# Altium PCB analog circuit pcb.PcbDoc
Units mil, origin at the board's own origin, x right, y up, seen from the top; angles counter-clockwise.
Board outline 4920 x 7755 mil, 2 copper layers (Top Layer, Bottom Layer); 48 components, 33 nets, 163 pads, 4 vias.
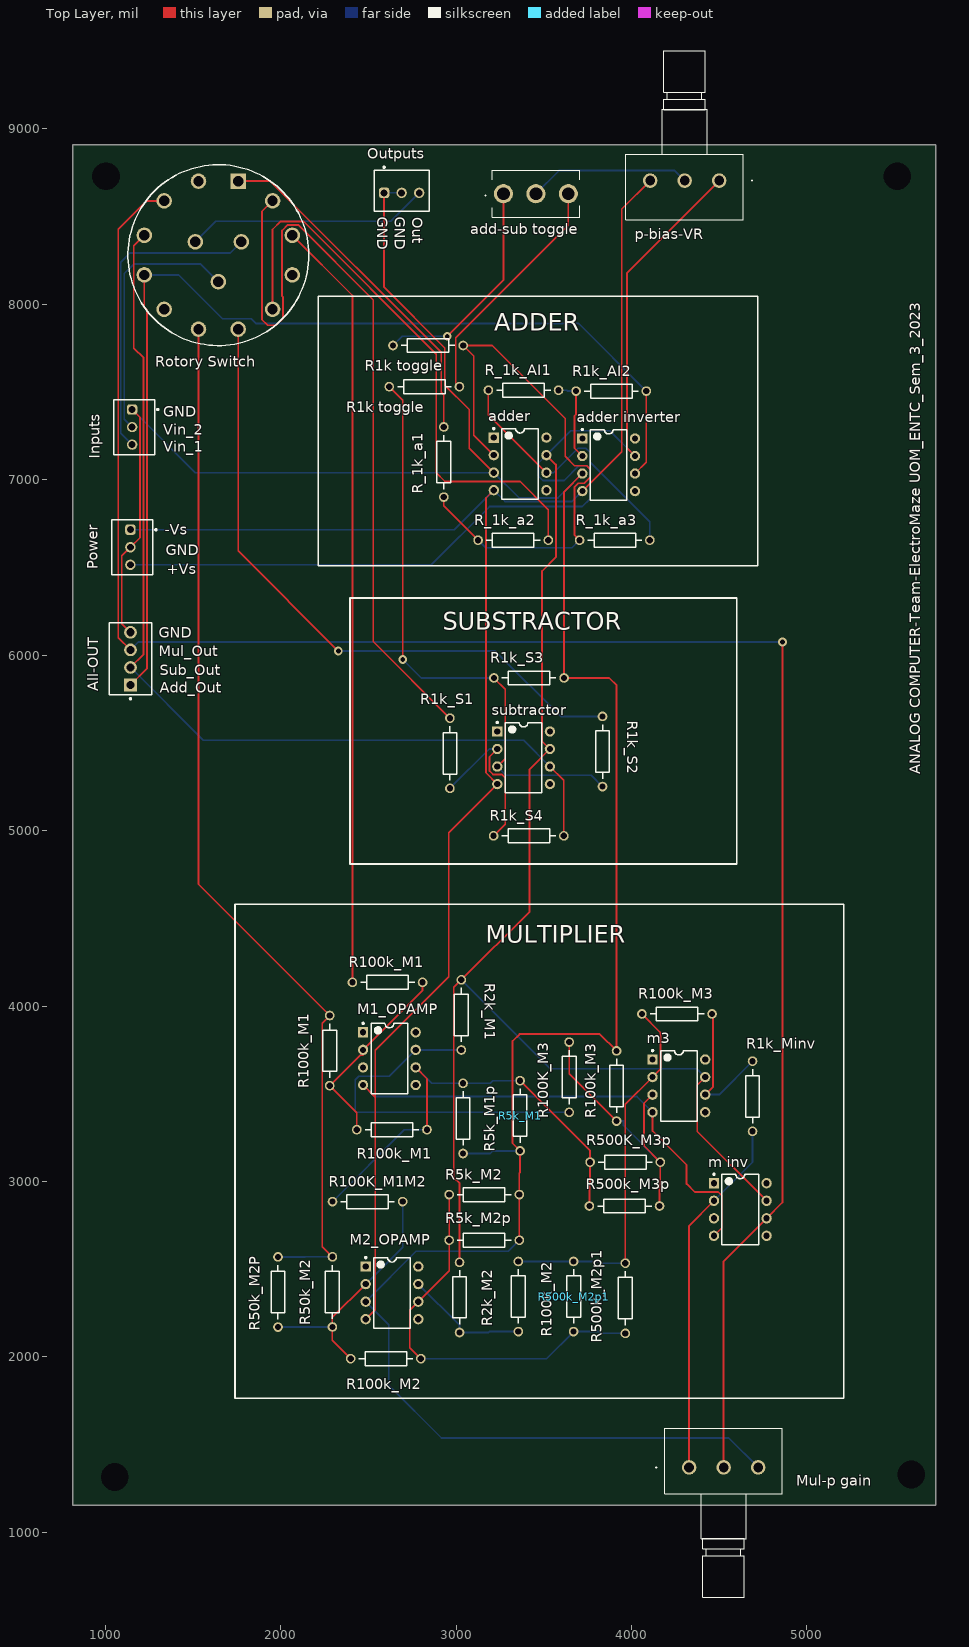
[diagram p0: Top Layer view]
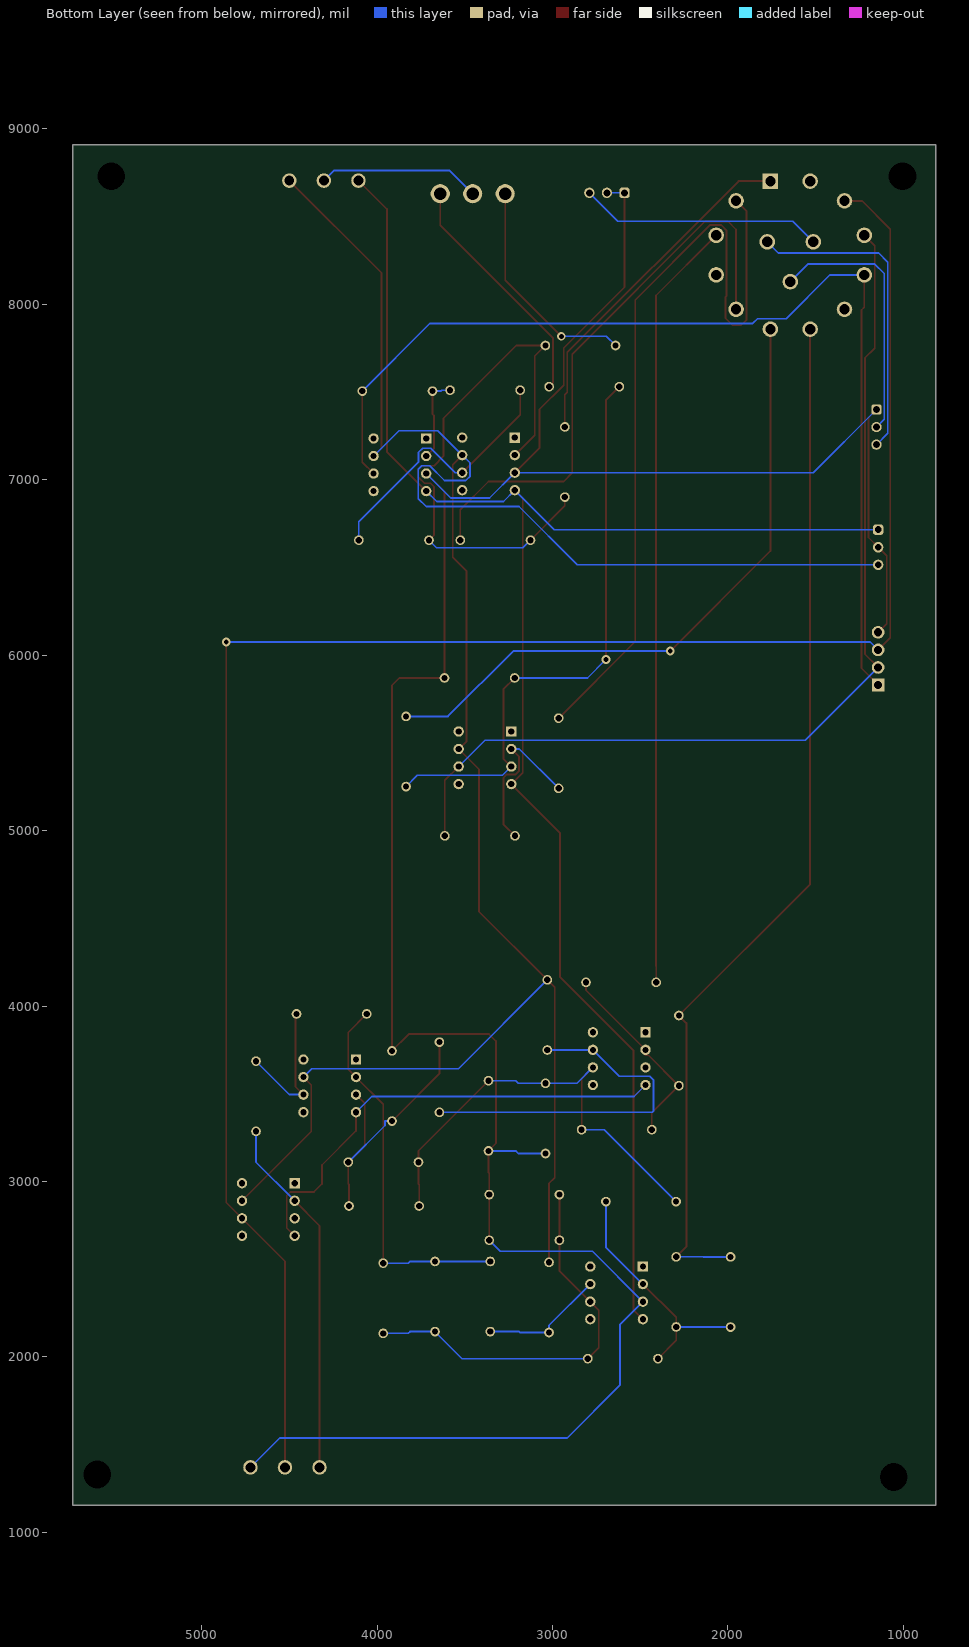
[diagram p1: Bottom Layer view, seen from below]
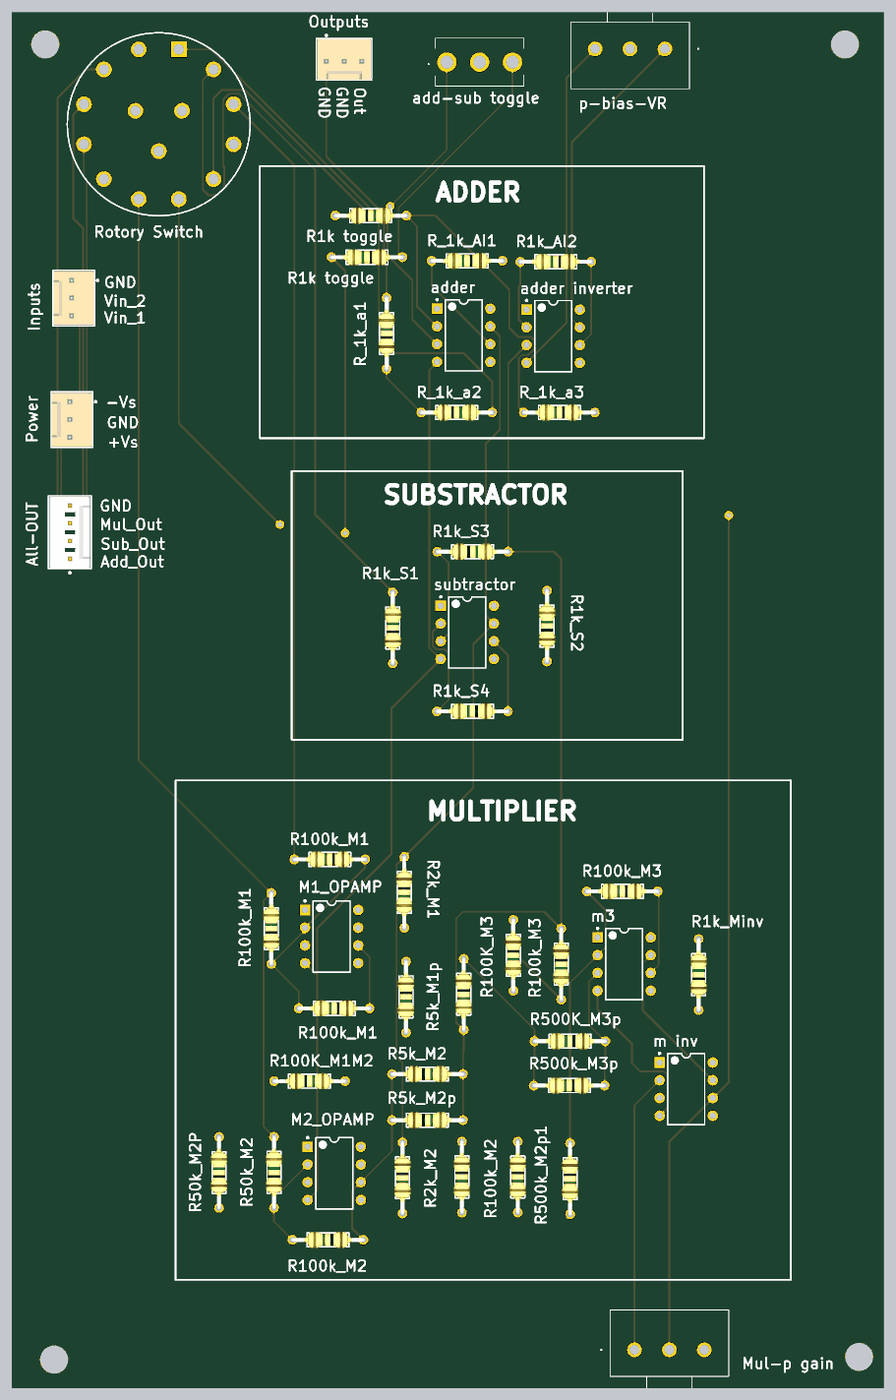
[diagram p2: 3D render of the assembled board from above, using the file's embedded part models]

## Layer stack, top to bottom
Top Solder: solder mask 0.4, Solder Resist, Dk 3.5
Top Layer: signal copper 1.4
Dielectric 1: dielectric 12.6, FR-4, Dk 4.8
Bottom Layer: signal copper 1.4
Bottom Solder: solder mask 0.4, Solder Resist, Dk 3.5

## Board outline
815,1155 5735,1155 5735,8910 815,8910

## Design rules (kind name [scope] priority, off if disabled: settings)
Clearance [All] p1: gap=10 ignorepadtopadclearanceinfootprint=FALSE except(0: Arc-Hole Track-Hole SMDPad-Hole THPad-Hole Via-Hole Fill-Hole Poly-Hole Region-Hole Text-Hole)
PolygonConnect [All] p1: connectstyle=Relief reliefconductorwidth=10 reliefentries=4 polygonreliefangle="90 Angle" airgapwidth=10
RoutingVias [All] p1: holewidth=28 width=50 viastyle="Through Hole" minholewidth=28 minwidth=50 maxholewidth=28 maxwidth=50
SolderMaskExpansion [All] p1: expansion=4 istentingtop=FALSE
Width [All] p1: maxlimit=20 minlimit=10 preferedwidth=10 minimp=50.000000 maximp=50.000000 favimp=50.000000
30 further rules are at their usual default settings.

## Classes and differential pairs
component class Sheet2: "add-sub toggle" adder "adder inverter" All-OUT Inputs M1_OPAMP M2_OPAMP m3 "m inv" "Mul-p gain" Outputs p-bias-VR Power "R1k toggle" R1k_AI2 R1k_Minv R1k_S1 R1k_S2 R1k_S3 R1k_S4 R2k_M1 R2k_M2 R5k_M1 R5k_M1p R5k_M2 R5k_M2p R50k_M2 R50k_M2P R100k_M1 R100K_M1M2 R100k_M2 R100k_M3 R100K_M3 R500k_M2p1 R500K_M3p R500k_M3p R_1k_a1 R_1k_a2 R_1k_a3 R_1k_AI1 "Rotory Switch" subtractor

## Components (designator, comment, footprint, x,y, rotation, side; value= is the part's Value field where it differs from the comment)
"add-sub toggle" "100SP3T1B1M2QE" 100SP3T1B1M2QE 3269.96,8630 r0 top
adder "TL071CP" P0008A 3365,7090 r0 top
"adder inverter" "TL071CP" P0008A 3870,7085 r0 top
All-OUT "22-29-2041" FP-22-29-2041-MFG 1143.43,5980 r270 top
Inputs "61900311121" 61900311121 1165.47,7300 r90 top
M1_OPAMP "UA741CP" P0008A 2620,3700 r0 top
M2_OPAMP "UA741CP" P0008A 2635,2365 r0 top
m3 "UA741CP" P0008A 4270,3545 r0 top
"m inv" "TL071CP" P0008A 4620,2840 r0 top
"Mul-p gain" "P160KN-0QC15B50K" P160KN0QC15B50K 4328.15,1370 r0 top
Outputs "61900311121" 61900311121 2690,8646.81 r180 top
p-bias-VR "P160KN-0QC15B50K" P160KN0QC15B50K 4500,8705 r180 top
Power "61900311121" 61900311121 1155.47,6615 r90 top
"R1k toggle" "R 1k" "Axial 0.4" 2820,7530 r0 top value=10kR
"R1k toggle" "R 1k" "Axial 0.4" 2840,7765 r180 top value=10kR
R1k_AI2 "R 1k" "Axial 0.4" 3885,7505 r0 top value=10kR
R1k_Minv "R 1k" "Axial 0.4" 4690,3485 r270 top value=10kR
R1k_S1 "R1k_S2" "Axial 0.4" 2965,5440 r270 top value=10kR
R1k_S2 "R 1k" "Axial 0.4" 3835,5450 r270 top value=10kR
R1k_S3 "R 1k" "Axial 0.4" 3415,5870 r180 top value=10kR
R1k_S4 "R 1k" "Axial 0.4" 3415,4970 r0 top value=10kR
R2k_M1 "R 2k" "Axial 0.4" 3030,3950 r90 top value=10kR
R2k_M2 "R 2k" "Axial 0.4" 3020,2340 r90 top value=10kR
R5k_M1 "R 5k" "Axial 0.4" 3365,3375 r90 top value=10kR
R5k_M1p "R 5k" "Axial 0.4" 3040,3360 r90 top value=10kR
R5k_M2 "R 5k" "Axial 0.4" 3160,2925 r180 top value=10kR
R5k_M2p "R 5k" "Axial 0.4" 3160,2665 r180 top value=10kR
R50k_M2 "R 50k" "Axial 0.4" 2295,2370 r270 top value=10kR
R50k_M2P "R 50k" "Axial 0.4" 1985,2369.21 r270 top value=10kR
R100k_M1 "R 100k" "Axial 0.4" 2610,4135 r0 top value=10kR
R100k_M1 "R 100k" "Axial 0.4" 2635,3295 r0 top value=10kR
R100k_M1 "R 100k" "Axial 0.4" 2280,3745 r270 top value=10kR
R100K_M1M2 "R 100k" "Axial 0.4" 2495,2885 r180 top value=10kR
R100k_M2 "R 100k" "Axial 0.4" 3355,2345 r90 top value=10kR
R100k_M2 "R 100k" "Axial 0.4" 2600,1990 r0 top value=10kR
R100k_M3 "R 100k" "Axial 0.4" 4260,3955 r0 top value=10kR
R100k_M3 "R 100k" "Axial 0.4" 3915,3545 r90 top value=10kR
R100K_M3 "R 100k" "Axial 0.4" 3645,3595 r90 top value=10kR
R500k_M2p1 "R 500k" "Axial 0.4" 3965,2335 r90 top value=10kR
R500k_M2p1 "R 500k" "Axial 0.4" 3670,2345 r90 top value=10kR
R500k_M3p "R 500k" "Axial 0.4" 3960.79,2860 r0 top value=10kR
R500K_M3p "R 500k" "Axial 0.4" 3965,3110 r0 top value=10kR
R_1k_a1 "R 1k" "Axial 0.4" 2930,7100 r270 top value=10kR
R_1k_a2 "R 1k" "Axial 0.4" 3325,6655 r180 top value=10kR
R_1k_a3 "R 1k" "Axial 0.4" 3905,6655 r0 top value=10kR
R_1k_AI1 "R 1k" "Axial 0.4" 3385,7510 r0 top value=10kR
"Rotory Switch" "A30403RNCQ" SW_A30403RNCQ 1645,8280 r90 top
subtractor "TL071CP" P0008A 3385,5415 r0 top

## Footprints (in the part's own frame and the unit in brackets; to place one, negate y for a bottom-side part, rotate by r counter-clockwise, add the part's x,y. Pads: shape width x height; smd on the part's side, far side on the other; paste and mask are expansions set on the pad)
100SP3T1B1M2QE [mm]
  round 2.775 hole 1.85: 1(0,0) 2(4.7,0) 3(9.4,0)
  silkscreen extent -2.65,-3.43 11.05,3.43
61900311121 [mm] "2.54mm Male Locking Header, 3p"
  rrect50% 1.5x1.5 hole 1: 1(2.54,0.3)
  round 1.5 hole 1: 2(0,0.3) 3(-2.54,0.3)
  silkscreen extent -3.98,-3.52 3.98,2.98, body extent -3.81,-2.9 3.81,2.9, height 11.53
"Axial 0.4" [mm]
  round 1.4 hole 0.9: 1(-5.1,0) 2(5.06,0)
  silkscreen extent -3.9,-1 3.9,1, body extent -5.4,-1.16 5.36,1.17, height 2.09
FP-22-29-2041-MFG [mm]
  rect 1.84x1.84 hole 1.19 paste-1000 mask+0: 1(3.81,0.02)
  round 1.84 hole 1.19 paste-1000 mask+0: 2(1.27,0.02) 3(-1.27,0.02) 4(-3.81,0.02)
  silkscreen extent -5.21,-3.07 5.93,3.08, body extent -5.31,-3.18 5.31,3.18, height 0.25
P0008A [mm] "DIP, 8-Leads, Body 10.15x6.6mm, Pitch 2.54mm"
  rect 1.5x1.5 hole 0.9: 1(-3.81,3.81)
  round 1.5 hole 0.9: 2(-3.81,1.27) 3(-3.81,-1.27) 4(-3.81,-3.81) 5(3.81,-3.81) 6(3.81,-1.27) 7(3.81,1.27) 8(3.81,3.81)
  silkscreen extent -3.93,-5.1 2.65,5.23, body extent -3.95,-5.07 3.95,5.07, height 5.08
P160KN0QC15B50K [mm]
  round 2.1 hole 1.4: 1(0,0) 2(5,0) 3(10,0)
  silkscreen extent -4.8,-18.8 13.5,5.7
SW_A30403RNCQ [mm]
  rect 2.25x2.25 hole 1.5: 1(10.72,-2.87)
  round 2.25 hole 1.5: 2(7.85,-7.85) 3(2.87,-10.72) 4(-2.87,-10.72) 5(-7.85,-7.85) 6(-10.72,-2.87) 7(-10.72,2.87) 8(-7.85,7.85) 9(-2.87,10.72) 10(2.87,10.72) 11(7.85,7.85) 12(10.72,2.87) A(1.925,-3.334) B(-3.85,0) C(1.925,3.334)
  silkscreen extent -13.09,-13.1 13.09,13.09

## Part data
"add-sub toggle": "SWITCH TOGGLE SPDT 5A 120V", Manufacturer_Name=E-Switch, Mouser Part Number=612-100SP3T1B1M2QE, Datasheet Link=https://sten-eswitch-13110800-production.s3.amazonaws.com/system/asset/product_line/data_sheet/129/100.pdf, Geometry.Height=29.68mm, Manufacturer_Part_Number=100SP3T1B1M2QE, Mouser Price/Stock=https://www.mouser.co.uk/ProductDetail/E-Switch/100SP3T1B1M2QE?qs=qz1iJzlMsAer8SwVP%252BoX2w%3D%3D
adder "adder inverter" "m inv" subtractor: library part CMP-0017-00972-2, "Low-Noise JFET-Input General-Purpose Operational Amplifier, 7 to 36 V, 0 to 70 degC, 8-pin DIP (P8), Pb-Free (RoHS)", Manufacturer="Texas Instruments", Rating=Military, Total Supply Voltage(Max)(+5V is 5, +/-5V is 10)=36, Total Supply Voltage(Min)(+5V is 5, +/-5V is 10)=7, CMRR(Min)(dB)=70, Code_JEDEC=MS-001, ComponentLink1Description="Manufacturer URL", ComponentLink1URL=http://www.ti.com/, ComponentLink2Description=Datasheet, ComponentLink2URL=http://www.ti.com/lit/ds/symlink/tl071.pdf, ComponentLink3Description="Package Specification", ComponentLink3URL=http://www.ti.com/litv/pdf/mpdi001b, DatasheetVersion=SLOS080J, Eco-Plan="Pb-Free (RoHS)", GBW(Typ)(MHz)=3, IIB(Max)(pA)=200, Iq per channel(Max)(mA)=2.5, Mounting Technology="Through Hole", Number of Channels=1, Offset Drift(Typ)(uV/C)=18, PackageDescription="8-Pin Plastic In-Line, Body 9.59 x 6.35 mm, Pitch 2.54 mm", PackageReference=P0008A, PackageVersion="4040082/E, 04/2010", PartNumber=TL071CP, Slew Rate(Typ)(V/us)=13, Sub Family="General Purpose Amplifier, High Supply Voltage Amplifier (>=30V)", Vio (25C)(Max)(mV)=10, Vn at 1kHz(Typ)(nV/rtHz)=18
All-OUT: library part CMP-04776-000366-1, "CONN HEADER VERT 4POS 2.54MM", Color=Natural, Contact Resistance=10mR, Current Rating=4A, Flammability Rating="UL94 V-0", Housing Color=White, Insulation Resistance=50GR, Max Operating Temperature=75°C, Min Operating Temperature=0°C, Package Quantity=1500, Voltage Rating=250V, Contact Gender=Male, Contact Material=Brass, Contact Mating Length=0.295inch, Contact Plating=Gold, Contact Type="Male Pin", Depth=5.8mm, Fastening Type=Friction, Gender=Male, Glow Wire Compliant=Non-compliant, Halogen Free="Low Halogen", Height=11.7mm, Housing Material=Nylon, Lead Free="Lead Free", Length=10.16mm, Max Current Rating=4A, Mount="Through Hole", Number of Circuits=4, Number of Contacts=4, Number of Lines=1, Number of Poles=4, Number of Positions=4, Number of Rows=1, Orientation=Straight, Packaging=Bulk, Pitch=2.54mm, Radiation Hardening=No, RoHS Compliant=Yes, Series="KK® 6410", Termination=Solder, Voltage Rating (DC)=250V
Inputs Outputs Power: library part CMP-1502-00585-2, Color=Beige, Contact Resistance=20mΩ, Current Rating=3A, Flammability Rating="UL94 V-0", Insulation Resistance=1GΩ, Max Operating Temperature=105°C, Min Operating Temperature=-40°C, Operating Supply Voltage=250V, Connector Type="Male Pin", Contact Gender=Male, Contact Material=Copper, Contact Mating Length=7.493mm, Contact Plating=Tin, Fastening Type=Friction, Gender=Male, Height=12.5mm, Housing Material=Nylon, Lead Pitch=2.54mm, Length=7.62mm, Mount="Through Hole", NexarPartId=18818222, Number of Contacts=3, Number of Pins=3, Number of Positions=3, Number of Rows=1, Orientation=Vertical, Packaging=Bulk, Pitch=2.54mm, REACH SVHC=Unknown, RoHS=Compliant, Termination="Through Hole", Voltage Rating=250V, Width=7.66mm
M1_OPAMP M2_OPAMP m3: library part CMP-0017-00973-2, "General-Purpose Operational Amplifier, 7 to 36 V, 0 to 70 degC, 8-pin DIP (P8), Pb-Free (RoHS)", Manufacturer="Texas Instruments", Total Supply Voltage(Max)(+5V is 5, +/-5V is 10)=36, Total Supply Voltage(Min)(+5V is 5, +/-5V is 10)=7, CMRR(Min)(dB)=70, Code_JEDEC=MS-001, ComponentLink1Description="Manufacturer URL", ComponentLink1URL=http://www.ti.com/, ComponentLink2Description=Datasheet, ComponentLink2URL=http://www.ti.com/lit/ds/symlink/ua741.pdf, ComponentLink3Description="Package Specification", ComponentLink3URL=http://www.ti.com/litv/pdf/mpdi001b, DatasheetVersion=SLOS094B, Eco-Plan="Pb-Free (RoHS)", GBW(Typ)(MHz)=1, IIB(Max)(pA)=800000, Iq per channel(Max)(mA)=2.8, Mounting Technology="Through Hole", Number of Channels=1, PackageDescription="8-Pin Plastic In-Line, Body 9.59 x 6.35 mm, Pitch 2.54 mm", PackageReference=P0008A, PackageVersion="4040082/E, 04/2010", PartNumber=UA741CP, Slew Rate(Typ)(V/us)=0.5, Sub Family="General Purpose Amplifier, High Supply Voltage Amplifier (>=30V)", Vio (25C)(Max)(mV)=6
"Mul-p gain" p-bias-VR: "Res Conductive Plastic POT 50K Ohm 20% 1/5W 1(Elec)/1(Mech)Turn 6mm Pin Panel Mount/Through Hole", Manufacturer_Name="TT Electronics", Mouser Part Number=858-P160KN-0QC15B50K, Arrow Part Number=P160KN-0QC15B50K, Arrow Price/Stock=https://www.arrow.com/en/products/p160kn-0qc15b50k/bi-technologies?region=nac, Datasheet Link=https://componentsearchengine.com/Datasheets/1/P160KN-0QC15B50K.pdf, Geometry.Height=20.75mm, Manufacturer_Part_Number=P160KN-0QC15B50K, Mouser Price/Stock=https://www.mouser.co.uk/ProductDetail/BI-Technologies-TT-Electronics/P160KN-0QC15B50K?qs=%252BUYXD5bnyXpKo3aD9urnhA%3D%3D
"R1k toggle" "R1k toggle" R1k_AI2 R1k_Minv R1k_S1 R1k_S2 R1k_S3 R1k_S4 R2k_M1 R2k_M2 R5k_M1 R5k_M1p R5k_M2 R5k_M2p R50k_M2 R50k_M2P R100k_M1 R100k_M1 R100k_M1 R100K_M1M2 R100k_M2 R100k_M2 R100k_M3 R100k_M3 R100K_M3 R500k_M2p1 R500k_M2p1 R500k_M3p R500K_M3p R_1k_a1 R_1k_a2 R_1k_a3 R_1k_AI1: library part CF14JT10K0_1_1_1_1, "Fixed Resistor, Carbon Film, 0.25W, 10000ohm, 350V, 5% +/-Tol, -500,0ppm/Cel, Through Hole Mount", Manufacturer="Stackpole Electronics", Manufacturer Part Number=CF14JT10K0, Max Operating Temperature=155°C, Min Operating Temperature=-55°C, Package Diameter=2.3mm, Package Length=6mm, Package Shape=Tubular, Package Style=AxialMeter, Power=250mW, Rated Temperature=70°C, Resistor Type="FIXED RESISTOR", Supplier Part Number=CF14JT10K0TR-ND, Temperature Coefficient=500ppm/°C, Tolerance=5%, Working Voltage=350V, Category="Through-Hole Resistors", ComponentLink1Description=https://datasheet.ciiva.com:443/pdfs/VipMasterIC/IC/SEIE/SEIE-S-A0009883960/SEIE-S-A0009883960-1.pdf?src-supplier=IHS+Markit, ComponentLink1URL=https://datasheet.ciiva.com:443/pdfs/VipMasterIC/IC/SEIE/SEIE-S-A0009883960/SEIE-S-A0009883960-1.pdf?src-supplier=IHS+Markit, ComponentLink2Description=http://components.arrow.com/part/dataview/27619991S9848636N1174?src-supplier=Arrow+Electronics, ComponentLink2URL=http://components.arrow.com/part/dataview/27619991S9848636N1174?src-supplier=Arrow+Electronics, ComponentLink3Description=https://www.seielect.com/catalog/SEI-CF_CFM.pdf?src-supplier=Avnet, ComponentLink3URL=https://www.seielect.com/catalog/SEI-CF_CFM.pdf?src-supplier=Avnet, ComponentLink4Description=https://www.seielect.com/catalog/SEI-Packaging.pdf?src-supplier=Digi-Key, ComponentLink4URL=https://www.seielect.com/catalog/SEI-Packaging.pdf?src-supplier=Digi-Key, ComponentLink5Description=https://www.verical.com/server-webapp/html/getDatasheet?partID=367360&src-supplier=Verical, ComponentLink5URL=https://www.verical.com/server-webapp/html/getDatasheet?partID=367360&src-supplier=Verical, ComponentLink6Description=http://www.seielect.com/Catalog/SEI-CF_CFM.pdf?src-supplier=Future+Electronics, ComponentLink6URL=http://www.seielect.com/Catalog/SEI-CF_CFM.pdf?src-supplier=Future+Electronics, Construction=Tubular, JESD-609 Code=e3, Lead Diameter=0.55mm, Lead Length=28mm, Mounting Technology="Through Hole", Packaging="Tape and Reel", Pins=2, Pricing="5000=0.00729, 10000=0.00633, 25000=0.00557, 50000=0.0051, 125000=0.005 (USD)", Reach SVHC Compliant=Yes, RoHS=Yes, RoHS Compliant=Yes, Supplier=Digi-Key, Technology="CARBON FILM", Terminal Finish=Tin, Termination=Wire
"Rotory Switch": "Rotary Switch 4 Position 3P4T 2.5A (AC), 350mA (DC) 125VAC Panel Mount, Through Hole", Package=None, Availability=Unavailable, Check_prices=f, MF=C&K, MP=A30403RNCQ, Price=None, SnapEDA_Link=https://www.snapeda.com/parts/A30403RNCQ/C&K/view-part/438327/?ref=snap

## Free pads (board coordinates)
  round 60 hole 158: 2(1005,8730) 2(1055,1315) 2(5515,8730) 2(5595,1330)

## Via types
v1: diameter 50, hole 28, Top Layer to Bottom Layer, 4 vias

## Nets (pads, with @x,y where several pads share a name; then routed paths per layer and width w, separated by ;. In a path a pad name is that pad's centre, name@x,y a point inside that pad or via, vN(x,y) a via of type N, cw(c..) or ccw(c..) an arc to the next point about the centre after c; other vN are vias at no path point)
+12V: "adder inverter.7" "m inv.7" adder.7 m3.7 p-bias-VR.1 Power.3 R2k_M1.2 R2k_M2.2 subtractor.7 | length 13283
  Top Layer w10: R2k_M2.2 3020,2989 2987,3022 2987,4106.21 R2k_M1.2 3419,4538.21 3419,5349 subtractor.7 3490,5510 3490,6479 3569,6558 3569,7086 adder.7 ; 4020,7135 3975,7180 3975,8180 p-bias-VR.1 ; m3.7 4375,3550 4375,3285 4770,2890
  Bottom Layer w10: Power.3 2859,6515 3191,6847 3720,6847 3765,6892 3765,7060 3745.47,7079.53 3700,7079.53 3615.94,6995.47 3494.53,6995.47 3470,7020 3470,7095 adder.7 3654.53,7279.53 3875.47,7279.53 4020,7135 ; R2k_M1.2 3536.21,3643 4372,3643 m3.7
-12V: "adder inverter.4" "m inv.4" adder.4 M1_OPAMP.4 M2_OPAMP.4 m3.4 p-bias-VR.3 Power.1 subtractor.4 | length 12509.9
  Top Layer w10: M1_OPAMP.4 2539,3481 ; M2_OPAMP.4 2539,2269 2539,3481 ; adder.4 3170.47,6895.47 3170.47,5329.53 subtractor.4 2958,4988 2958,4166 2539,3747 2539,3481 ; 3720,6935 3944,7159 3944,8542.7 p-bias-VR.3 ; m3.4 4120,3288 4314,3094 4314,2986 4360,2940 4495,2940 4515,2920 4515,2735 4470,2690
  Bottom Layer w10: Power.1 2990,6715 adder.4 3279.53,6875.47 3660.47,6875.47 3720,6935 ; M1_OPAMP.4 2536,3484 4031,3484 m3.4
add1: "Rotory Switch.1" R_1k_a1.1 | length 1993
  Top Layer w10: 1757.99,8702.05 1939.41,8702.05 2916,7725.46 2916,7498.67 2930,7484.67 R_1k_a1.1
add2: "Rotory Switch.5" R_1k_a2.1 | length 3296.9
  Top Layer w10: 1954.06,7970.95 1954.06,8426.34 2000,8472.28 2130.72,8472.28 2887,7716 2887,7040 2937,6990 3365,6990 3525.79,6829.21 R_1k_a2.1
GND: "adder inverter.3" "Mul-p gain.3" adder.3 All-OUT.4 Inputs.1 M2_OPAMP.3 Outputs.1 Outputs.2 Power.2 R1k_S3.1 R5k_M1.1 R5k_M1p.1 R5k_M2.1 R5k_M2p.1 R100k_M3.2@3915,3744.21 | length 15734.4
  Top Layer w10: All-OUT.4 1095,6179.21 1095,6566.34 Power.2 1199,6670.34 1199,7354.66 Inputs.1 ; Outputs.1 2590,8096.53 2936,7750.53 2936,7539 3075,7400 3075,7180 adder.3 ; R5k_M2p.1 R5k_M2.1 3360.79,3047 3365,3051.21 R5k_M1.1 3322,3217.21 3322,3800 3362,3840 3819.21,3840 3915,3744.21 3915,5828.79 3873.79,5870 R1k_S3.1 3615.79,6930.79 3720,7035
  Bottom Layer w10: Inputs.1 1513.66,7040 adder.3 3359.53,6895.47 3580.47,6895.47 3720,7035 ; Outputs.1 Outputs.2 ; R5k_M1p.1 3195,3159.21 3210,3174.21 R5k_M1.1 ; R5k_M2p.1 3297.79,2602 2772,2602 M2_OPAMP.3 2616,2184 2616,1839 2917,1538 4553.85,1538 4721.85,1370
m1: "Rotory Switch.3" R100k_M1.1@2409.21,4135 | length 4400.4
  Top Layer w10: 2067.05,8392.99 2410,8050.04 2410,4228 2409.21,4227.21 R100k_M1.1@2409.21,4135
m2: "Rotory Switch.7" R50k_M2.1 R50k_M2P.1 R100k_M1.1@2280,3945.79 | length 5949.2
  Top Layer w10: 1532.01,7857.95 1532.01,4693.78 2280,3945.79 2237,3902.79 2237,2628.79 R50k_M2.1
  Bottom Layer w10: R50k_M2P.1 2140,2570 2140.79,2570.79 R50k_M2.1
"Netadd-sub toggle_1": "add-sub toggle.1" "R1k toggle.2"@2640.79,7765 | length 1276.3
  Top Layer w10: v1(2950,7817) 3269.96,8136.96 3269.96,8630
  Bottom Layer w10: 2640.79,7765 2692.79,7817 v1(2950,7817)
"Netadd-sub toggle_2": "add-sub toggle.2" p-bias-VR.2 | length 926.4
  Bottom Layer w10: 3455,8630 3587,8762 4246.15,8762 p-bias-VR.2
"Netadd-sub toggle_3": "add-sub toggle.3" "R1k toggle.2"@3019.21,7530 | length 1374.7
  Top Layer w10: 3019.21,7530 2998,7551.21 2998,7808 3640.04,8450.04 3640.04,8630
"Netadder inverter_2": "adder inverter.2" R1k_AI2.1 R_1k_AI1.2 | length 494.5
  Top Layer w10: R1k_AI2.1 3684.21,7373 3675,7363.79 3675,7180 3720,7135
  Bottom Layer w10: R_1k_AI1.2 3631,7510 3636,7505 R1k_AI2.1
Netadder_2: "R1k toggle.1"@3040.79,7765 adder.2 R_1k_a1.2 R_1k_a2.2 R_1k_a3.1 | length 3255.1
  Top Layer w10: R_1k_a1.2 2930,6850.79 R_1k_a2.2 ; adder.2 3101,7254 3101,7704.79 3040.79,7765 3206,7765 3622,7349 3622,7133 3675,7080 3745,7080 3765,7060 3765,7015 3730,6980 3695.47,6980 3675.47,6960 3675.47,6683.74 R_1k_a3.1
  Bottom Layer w10: R_1k_a2.2 3168.79,6612 3661.21,6612 R_1k_a3.1
Netadder_6: adder.6 R_1k_a3.2 R_1k_AI1.1 | length 1565.2
  Top Layer w10: R_1k_AI1.1 3184.21,7370.79 adder.6
  Bottom Layer w10: adder.6 3555.47,7040 3695,7179.53 3740,7179.53 3764.53,7155 3764.53,7099.53 4104.21,6759.84 R_1k_a3.2
NetInputs_2: "Rotory Switch.B" Inputs.2 | length 1493.5
  Bottom Layer w10: Inputs.2 1109,7344.66 1109,8175 1163,8229 1544.43,8229 1645,8128.43
NetInputs_3: "Rotory Switch.A" Inputs.3 | length 1802
  Bottom Layer w10: Inputs.3 1089,7264.66 1089,8240 1141,8292 1712.47,8292 1776.26,8355.79
NetM1_OPAMP_2: M1_OPAMP.2 R100k_M1.1@2434.21,3295 R100k_M1.2@2280,3545.79 R100k_M1.2@2809.21,4135 | length 1132.9
  Top Layer w10: R100k_M1.1@2434.21,3295 2434.21,3391.58 2280,3545.79 2453.21,3719 2470,3719 M1_OPAMP.2 2809.21,4089.21 R100k_M1.2@2809.21,4135
NetM1_OPAMP_6: M1_OPAMP.6 R5k_M1.2 R5k_M1p.2 R100k_M1.2@2834.21,3295 R100K_M1M2.2 R500K_M3p.1 R500k_M3p.1 | length 2610
  Top Layer w10: M1_OPAMP.6 2834.21,3585.79 R100k_M1.2@2834.21,3295 ; R5k_M1.2 3764.21,3175 R500K_M3p.1 3764.21,2986.21 3760,2982 R500k_M3p.1
  Bottom Layer w10: R100K_M1M2.2 2705.79,3295 R100k_M1.2@2834.21,3295 ; M1_OPAMP.6 2860.79,3559.21 R5k_M1p.2 3195,3559.21 3210,3574.21 R5k_M1.2
NetM1_OPAMP_7: M1_OPAMP.7 R2k_M1.1 R100K_M3.1 | length 2078.1
  Bottom Layer w10: R2k_M1.1 2899.79,3749.21 2899,3750 M1_OPAMP.7 2620,3600 2445,3600 2425,3580 2425,3400 2430.79,3394.21 R100K_M3.1
NetM2_OPAMP_2: M2_OPAMP.2 R50k_M2.2 R50k_M2P.2 R100K_M1M2.1 R100k_M2.1@2399.21,1990 | length 1414.5
  Top Layer w10: R100k_M2.1@2399.21,1990 2295,2094.21 R50k_M2.2 2295,2225 M2_OPAMP.2
  Bottom Layer w10: R50k_M2P.2 2140,2170 2140.79,2170.79 R50k_M2.2 ; M2_OPAMP.2 2695.79,2625.79 R100K_M1M2.1
NetM2_OPAMP_6: M2_OPAMP.6 R5k_M2.2 R5k_M2p.2 R100k_M2.2@2799.21,1990 R500k_M2p1.1 | length 2288.1
  Top Layer w10: R100k_M2.2@2799.21,1990 2736,2053.21 2736,2266 M2_OPAMP.6 2960.79,2490.79 R5k_M2p.2 R5k_M2.2
  Bottom Layer w10: R100k_M2.2@2799.21,1990 3515.79,1990 3670,2144.21 3812,2144.21 3822,2134.21 R500k_M2p1.1@3965,2134.21
NetM2_OPAMP_7: M2_OPAMP.7 R2k_M2.1 R100k_M2.1@3355,2144.21 | length 710.2
  Bottom Layer w10: M2_OPAMP.7 3020,2180 R2k_M2.1 3185,2139.21 3190,2144.21 R100k_M2.1@3355,2144.21
Netm3_2: m3.2 R100k_M2.2@3355,2544.21 R100k_M3.1@4059.21,3955 R500k_M2p1.2 | length 2161.6
  Top Layer w10: R500k_M2p1.2@3965,2534.21 3965,3440 m3.2 4165,3640 4165,3849.21 R100k_M3.1@4059.21,3955
  Bottom Layer w10: R100k_M2.2@3355,2544.21 3670,2544.21 3812,2544.21 3822,2534.21 R500k_M2p1.2@3965,2534.21
Netm3_3: m3.3 R100k_M3.1@3915,3344.21 R100K_M3.2 R500k_M3p.2 R500K_M3p.2 | length 1618.4
  Top Layer w10: R100K_M3.2 3645,3614.21 R100k_M3.1@3915,3344.21 ; m3.3 4071,3446 4071,3203.21 R500K_M3p.2 4164.21,2986.21 4160,2982 R500k_M3p.2
  Bottom Layer w10: R100k_M3.1@3915,3344.21 3955,3344.21 3955,3319.21 R500K_M3p.2
Netm3_6: m3.6 R1k_Minv.1 R100k_M3.2@4459.21,3955 | length 833.5
  Top Layer w10: m3.6 4465,3540 4465,3955 R100k_M3.2@4459.21,3955
  Bottom Layer w10: m3.6 4499.21,3495 R1k_Minv.1
"Netm inv_2": "m inv.2" "Mul-p gain.1" R1k_Minv.2 | length 2065.7
  Top Layer w10: 4328.15,1370 4328.15,2748.15 4470,2890
  Bottom Layer w10: 4470,2890 4690,3110 R1k_Minv.2
NetOutputs_3: "Rotory Switch.C" Outputs.3 | length 1391.9
  Bottom Layer w10: 1513.74,8355.79 1630.95,8473 2628,8473 Outputs.3
"NetR1k toggle_1": "R1k toggle.1"@2619.21,7530 R1k_S2.2 R1k_S3.2 subtractor.3 | length 3347.6
  Top Layer w10: 2619.21,7530 2696,7453.21 v1(2696,5975) ; R1k_S3.2 3280,5805.79 3280,5410 subtractor.3
  Bottom Layer w10: v1(2696,5975) 2801,5870 R1k_S3.2 ; subtractor.3 3285,5315 3770.79,5315 R1k_S2.2
NetR1k_S1_2: R1k_S1.2 R1k_S4.1 subtractor.2 | length 969.7
  Top Layer w10: R1k_S4.1 3280,5035.79 3280,5300 3260,5320 3210.47,5320 3190.47,5340 3190.47,5420.47 subtractor.2
  Bottom Layer w10: R1k_S1.2 3189.21,5465 subtractor.2
out1: "adder inverter.6" "Rotory Switch.9" All-OUT.1 R1k_AI2.2 | length 6015
  Top Layer w10: All-OUT.1 1239,5924.79 1239,7966.95 1222.95,7983 1222.95,8167.01 ; 4020,7035 4084.21,7099.21 R1k_AI2.2
  Bottom Layer w10: 1222.95,8167.01 1419.99,8167.01 1669,7918 1832,7918 1859,7891 3698.21,7891 R1k_AI2.2
out2: "Rotory Switch.10" All-OUT.2 R1k_S4.2 subtractor.6 | length 5594.6
  Top Layer w10: All-OUT.2 1219,6004.79 1219,7694 1163,7750 1163,8333.04 1222.95,8392.99 ; subtractor.6 3614.21,5285.79 R1k_S4.2
  Bottom Layer w10: All-OUT.2 1559.21,5515 3385,5515 subtractor.6
out3: "m inv.6" "Mul-p gain.2" "Rotory Switch.11" All-OUT.3 | length 11332.5
  Top Layer w10: All-OUT.3 1075,6099.21 1075,8428.06 1236,8589.06 1335.95,8589.06 ; 4525,1370 4525,2545 4770,2790 4860,2880 v1(4860,6075)
  Bottom Layer w10: All-OUT.3 1189.21,6075 v1(4860,6075)
sub1: "Rotory Switch.2" R1k_S1.1 | length 4629.8
  Top Layer w10: 1954.06,8589.06 1894,8529 1894,7912 1926,7880 1974,7880 2014,7920 2014,8041 2007.76,8047.24 2007.76,8420.04 2040,8452.28 2100,8452.28 2528,8024.28 2528,6077.79 R1k_S1.1
sub2: "Rotory Switch.6" R1k_S2.1 | length 3731.6
  Top Layer w10: 1757.99,7857.95 1757.99,6594.01 v1(2329,6023)
  Bottom Layer w10: v1(2329,6023) 3224,6023 3596.21,5650.79 R1k_S2.1
pads on no net: "adder inverter.1" "adder inverter.5" "adder inverter.8" "m inv.1" "m inv.3" "m inv.5" "m inv.8" "Rotory Switch.4" "Rotory Switch.8" "Rotory Switch.12" adder.1 adder.5 adder.8 M1_OPAMP.1 M1_OPAMP.3 M1_OPAMP.5 M1_OPAMP.8 M2_OPAMP.1 M2_OPAMP.5 M2_OPAMP.8 m3.1 m3.5 m3.8 subtractor.1 subtractor.5 subtractor.8

## Silkscreen, mask and mechanical layers (free items; w line width, h text height)
Top Overlay:
  lines w10: 1740,1765 5210,1765 5210,4580 1740,4580 1740,1765 ; 2215,6510 4720,6510 4720,8045 2215,8045 2215,6510 ; 2395,4810 4600,4810 4600,6325 2395,6325 2395,4810
  text "GND" at 2550,8500 h60 r270
  text "GND" at 2650,8500 h60 r270
  text "Out" at 2750,8495 h60 r270
  text "ADDER" at 3218.62,7850.02 h100
  text "GND" at 1330,7360 h60
  text "Vin_2" at 1330,7255 h60
  text "Vin_1" at 1330,7160 h60
  text "-Vs" at 1340,6685 h60
  text "GND" at 1345,6570 h60
  text "+Vs" at 1350,6460 h60
  text "SUBSTRACTOR" at 2923.68,6145.02 h100
  text "GND" at 1305,6100 h60
  text "Mul_Out" at 1305,5995 h60
  text "Sub_Out" at 1310,5885 h60
  text "Add_Out" at 1310,5785 h60
  text "ANALOG COMPUTER-Team-ElectroMaze UOM_ENTC_Sem_3_2023" at 5645,5320 h60 r90
  text "MULTIPLIER" at 3170.07,4360.02 h100